# Altium PCB PCB_proj_module_1_1.PcbDoc (part 8 of 9)
Units mm, origin at the board's own origin, x right, y up, seen from the top; angles counter-clockwise.
Board outline 413 x 280 mm, 4 copper layers (Top Layer, Signal Layer 1, Signal Layer 2, Bottom Layer), stack 0.778 mm thick; 1054 components, 639 nets, 3181 pads, 673 vias.
Unrouted connection lines stored in the file: 570.
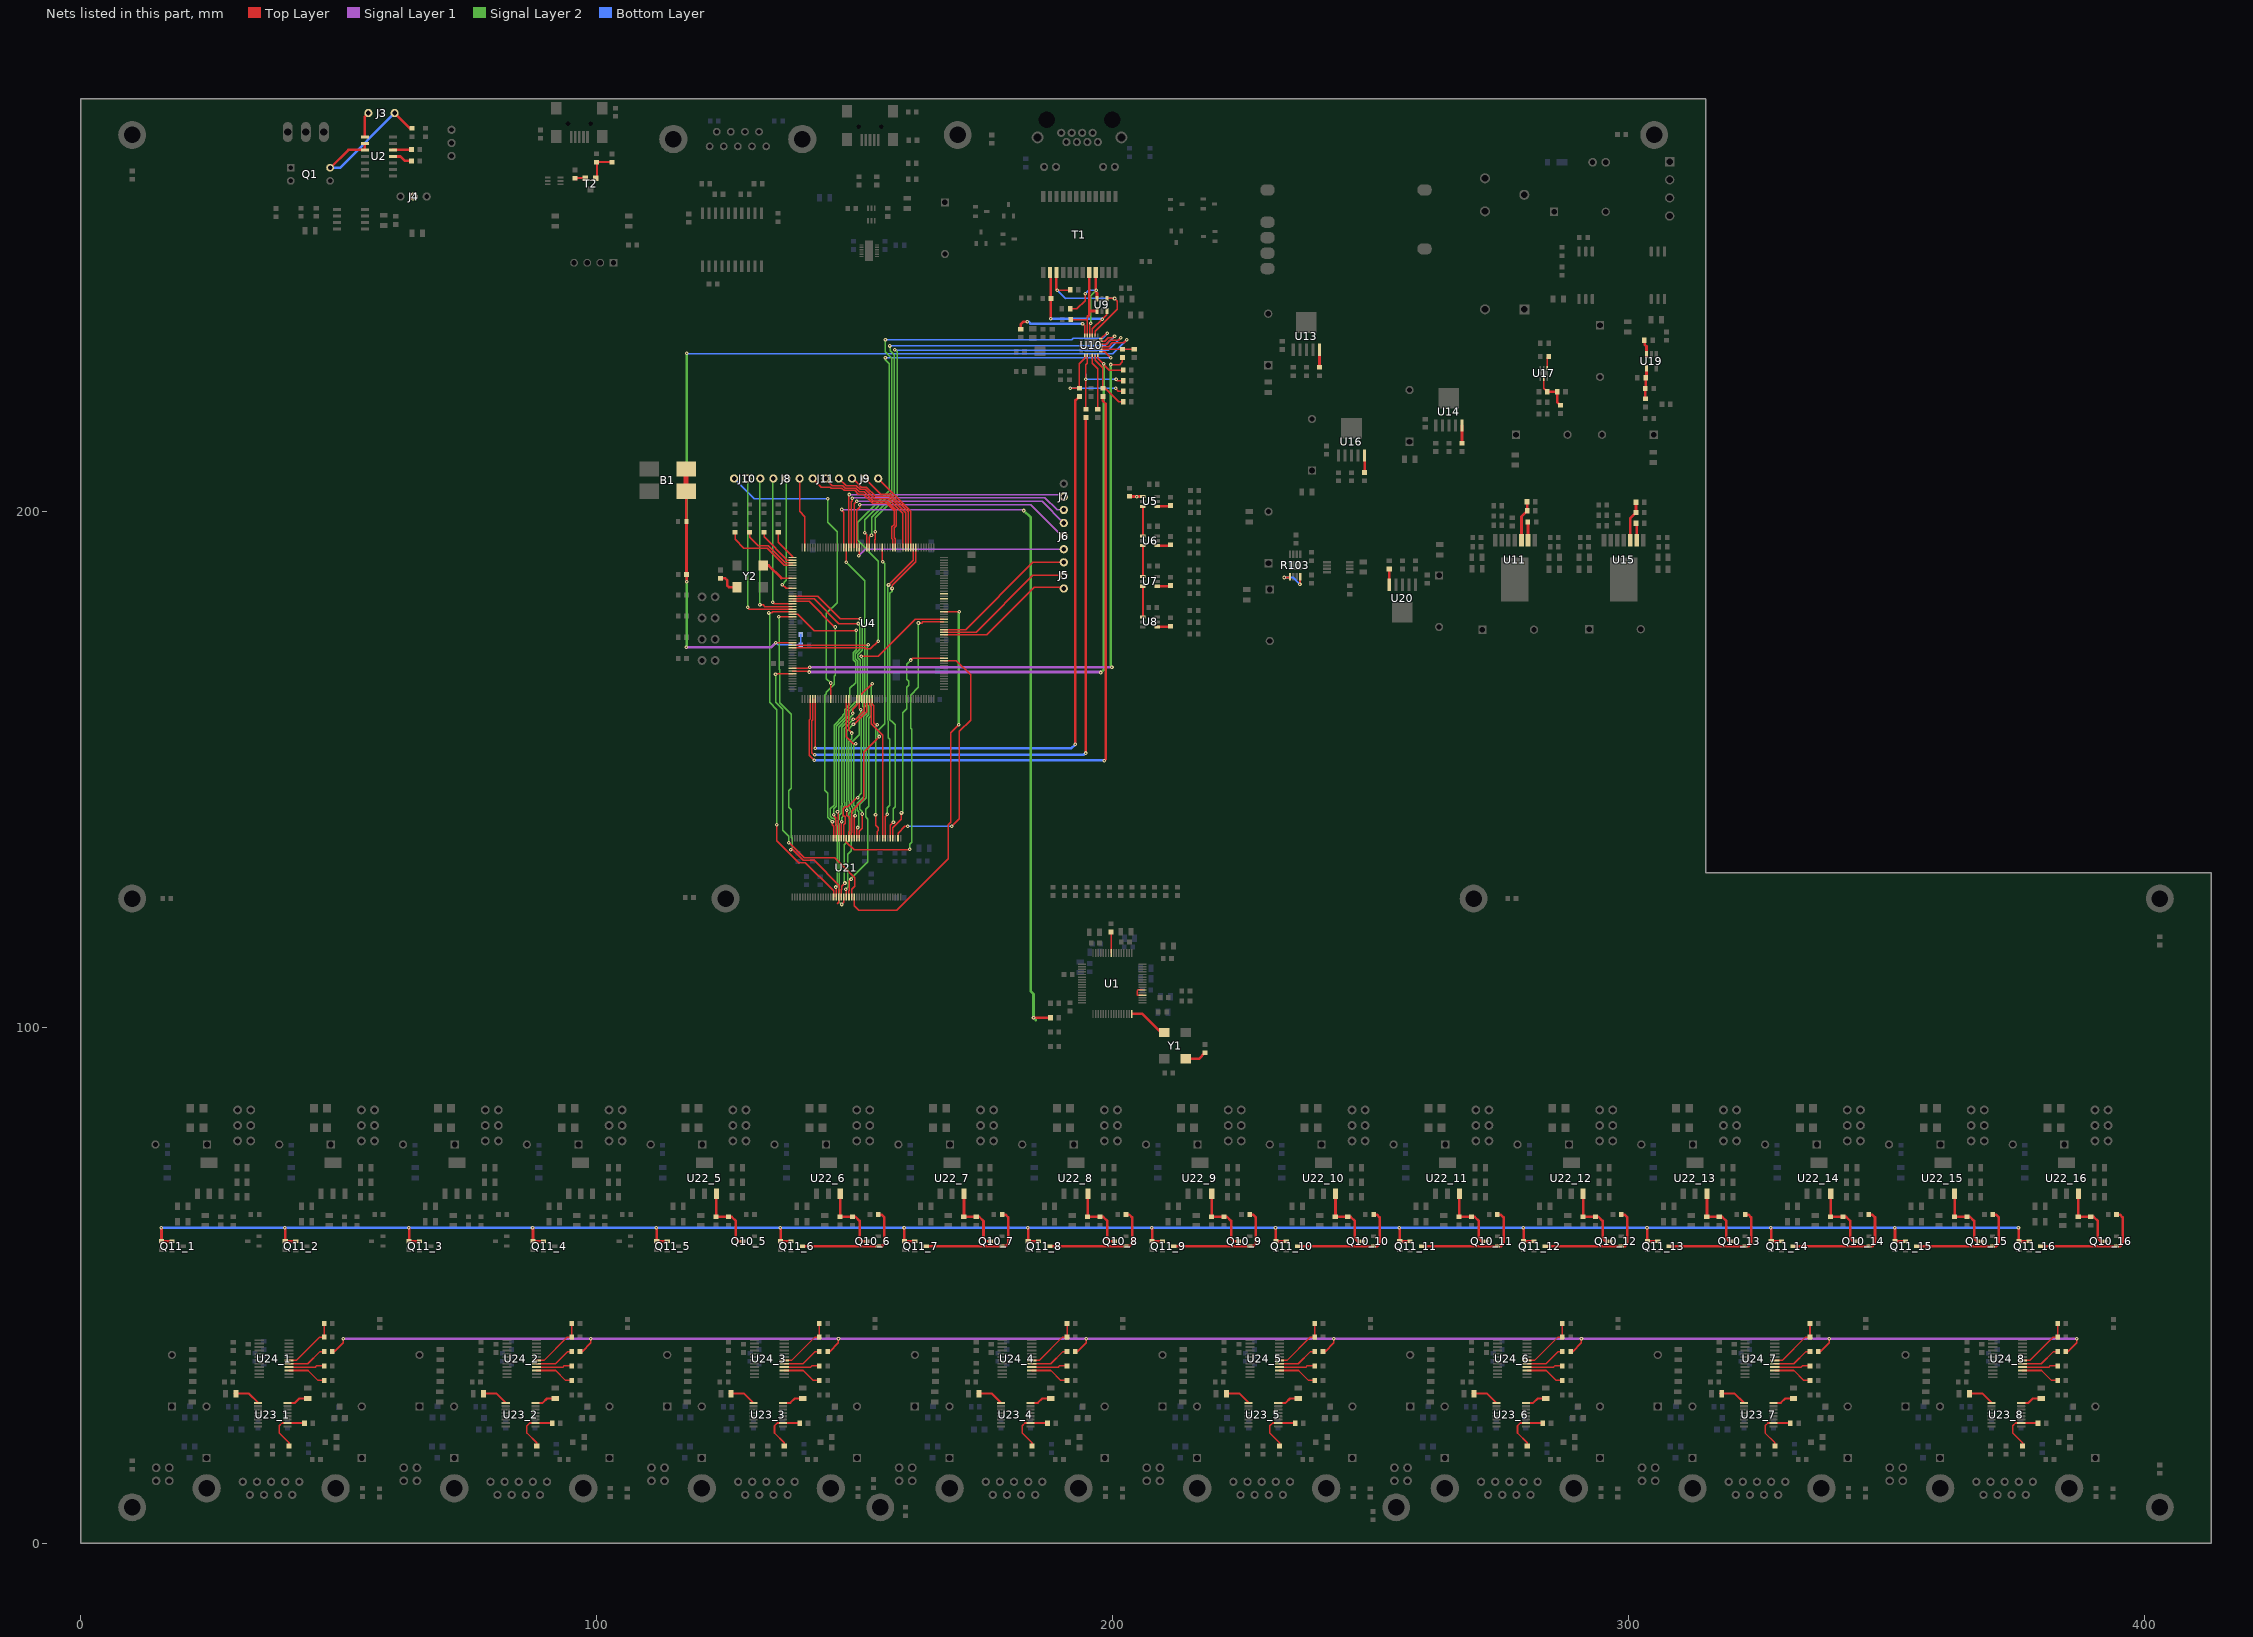
[diagram p9: the nets of this part, all layers, seen from the top]

## Via types
v1: diameter 0.7, hole 0.3, Top Layer to Bottom Layer, tented both sides, 659 vias
v2: diameter 1, hole 0.5, Top Layer to Bottom Layer, tented both sides, 12 vias
v3: diameter 0.66, hole 0.33, Top Layer to Bottom Layer, 2 vias

## Nets (pads, with @x,y where several pads share a name; then routed paths per layer and width w, separated by ;. In a path a pad name is that pad's centre, name@x,y a point inside that pad or via, vN(x,y) a via of type N, cw(c..) or ccw(c..) an arc to the next point about the centre after c; other vN are vias at no path point) (continued)
NetQ10_5_3: Q10_5.3 R113_5.1 R115_5.2 U22_5.3 | length 13.7
  Top Layer w0.5: R113_5.1@123.18,63.32 126.18,63.32 127,62.5 127,59.1 127.5,58.6 Q10_5.3@128.5,58.6 ; R113_5.1@123.23,63.37 U22_5.3@123.23,67.77
  Top Layer w0.508: R113_5.1@123.18,63.32 R113_5.1@123.23,63.37
NetQ10_6_1: Q10_6.1 Q11_6.3 R114_6.2 | length 22.7
  Top Layer w0.5: Q11_6.3@139.894,57.635 Q10_6.1@154.7,57.635 ; Q10_6.1@154.6,57.65 155.35,57.65 155.8,58.1 155.8,63.2 155.254,63.746 R114_6.2@154.614,63.746
NetQ10_6_3: Q10_6.3 R113_6.1 R115_6.2 U22_6.3 | length 13.7
  Top Layer w0.5: R113_6.1@147.18,63.32 150.18,63.32 151,62.5 151,59.1 151.5,58.6 Q10_6.3@152.5,58.6 ; R113_6.1@147.23,63.37 U22_6.3@147.23,67.77
  Top Layer w0.508: R113_6.1@147.18,63.32 R113_6.1@147.23,63.37
NetQ10_7_1: Q10_7.1 Q11_7.3 R114_7.2 | length 22.7
  Top Layer w0.5: Q11_7.3@163.894,57.635 Q10_7.1@178.7,57.635 ; Q10_7.1@178.6,57.65 179.35,57.65 179.8,58.1 179.8,63.2 179.254,63.746 R114_7.2@178.614,63.746
NetQ10_7_3: Q10_7.3 R113_7.1 R115_7.2 U22_7.3 | length 13.7
  Top Layer w0.5: R113_7.1@171.18,63.32 174.18,63.32 175,62.5 175,59.1 175.5,58.6 Q10_7.3@176.5,58.6 ; R113_7.1@171.23,63.37 U22_7.3@171.23,67.77
  Top Layer w0.508: R113_7.1@171.18,63.32 R113_7.1@171.23,63.37
NetQ10_8_1: Q10_8.1 Q11_8.3 R114_8.2 | length 22.7
  Top Layer w0.5: Q11_8.3@187.894,57.635 Q10_8.1@202.7,57.635 ; Q10_8.1@202.6,57.65 203.35,57.65 203.8,58.1 203.8,63.2 203.254,63.746 R114_8.2@202.614,63.746
NetQ10_8_3: Q10_8.3 R113_8.1 R115_8.2 U22_8.3 | length 13.7
  Top Layer w0.5: R113_8.1@195.18,63.32 198.18,63.32 199,62.5 199,59.1 199.5,58.6 Q10_8.3@200.5,58.6 ; R113_8.1@195.23,63.37 U22_8.3@195.23,67.77
  Top Layer w0.508: R113_8.1@195.18,63.32 R113_8.1@195.23,63.37
NetQ10_9_1: Q10_9.1 Q11_9.3 R114_9.2 | length 22.7
  Top Layer w0.5: Q11_9.3@211.894,57.635 Q10_9.1@226.7,57.635 ; Q10_9.1@226.6,57.65 227.35,57.65 227.8,58.1 227.8,63.2 227.254,63.746 R114_9.2@226.614,63.746
NetQ10_9_3: Q10_9.3 R113_9.1 R115_9.2 U22_9.3 | length 13.7
  Top Layer w0.5: R113_9.1@219.18,63.32 222.18,63.32 223,62.5 223,59.1 223.5,58.6 Q10_9.3@224.5,58.6 ; R113_9.1@219.23,63.37 U22_9.3@219.23,67.77
  Top Layer w0.508: R113_9.1@219.18,63.32 R113_9.1@219.23,63.37
NetQ10_10_1: Q10_10.1 Q11_10.3 R114_10.2 | length 22.7
  Top Layer w0.5: Q11_10.3@235.894,57.635 Q10_10.1@250.7,57.635 ; Q10_10.1@250.6,57.65 251.35,57.65 251.8,58.1 251.8,63.2 251.254,63.746 R114_10.2@250.614,63.746
NetQ10_10_3: Q10_10.3 R113_10.1 R115_10.2 U22_10.3 | length 13.7
  Top Layer w0.5: R113_10.1@243.18,63.32 246.18,63.32 247,62.5 247,59.1 247.5,58.6 Q10_10.3@248.5,58.6 ; R113_10.1@243.23,63.37 U22_10.3@243.23,67.77
  Top Layer w0.508: R113_10.1@243.18,63.32 R113_10.1@243.23,63.37
NetQ10_11_1: Q10_11.1 Q11_11.3 R114_11.2 | length 22.7
  Top Layer w0.5: Q11_11.3@259.894,57.635 Q10_11.1@274.7,57.635 ; Q10_11.1@274.6,57.65 275.35,57.65 275.8,58.1 275.8,63.2 275.254,63.746 R114_11.2@274.614,63.746
NetQ10_11_3: Q10_11.3 R113_11.1 R115_11.2 U22_11.3 | length 13.7
  Top Layer w0.5: R113_11.1@267.18,63.32 270.18,63.32 271,62.5 271,59.1 271.5,58.6 Q10_11.3@272.5,58.6 ; R113_11.1@267.23,63.37 U22_11.3@267.23,67.77
  Top Layer w0.508: R113_11.1@267.18,63.32 R113_11.1@267.23,63.37
NetQ10_12_1: Q10_12.1 Q11_12.3 R114_12.2 | length 22.7
  Top Layer w0.5: Q11_12.3@283.894,57.635 Q10_12.1@298.7,57.635 ; Q10_12.1@298.6,57.65 299.35,57.65 299.8,58.1 299.8,63.2 299.254,63.746 R114_12.2@298.614,63.746
NetQ10_12_3: Q10_12.3 R113_12.1 R115_12.2 U22_12.3 | length 13.7
  Top Layer w0.5: R113_12.1@291.18,63.32 294.18,63.32 295,62.5 295,59.1 295.5,58.6 Q10_12.3@296.5,58.6 ; R113_12.1@291.23,63.37 U22_12.3@291.23,67.77
  Top Layer w0.508: R113_12.1@291.18,63.32 R113_12.1@291.23,63.37
NetQ10_13_1: Q10_13.1 Q11_13.3 R114_13.2 | length 22.7
  Top Layer w0.5: Q11_13.3@307.894,57.635 Q10_13.1@322.7,57.635 ; Q10_13.1@322.6,57.65 323.35,57.65 323.8,58.1 323.8,63.2 323.254,63.746 R114_13.2@322.614,63.746
NetQ10_13_3: Q10_13.3 R113_13.1 R115_13.2 U22_13.3 | length 13.7
  Top Layer w0.5: R113_13.1@315.18,63.32 318.18,63.32 319,62.5 319,59.1 319.5,58.6 Q10_13.3@320.5,58.6 ; R113_13.1@315.23,63.37 U22_13.3@315.23,67.77
  Top Layer w0.508: R113_13.1@315.18,63.32 R113_13.1@315.23,63.37
NetQ10_14_1: Q10_14.1 Q11_14.3 R114_14.2 | length 22.7
  Top Layer w0.5: Q11_14.3@331.894,57.635 Q10_14.1@346.7,57.635 ; Q10_14.1@346.6,57.65 347.35,57.65 347.8,58.1 347.8,63.2 347.254,63.746 R114_14.2@346.614,63.746
NetQ10_14_3: Q10_14.3 R113_14.1 R115_14.2 U22_14.3 | length 13.7
  Top Layer w0.5: R113_14.1@339.18,63.32 342.18,63.32 343,62.5 343,59.1 343.5,58.6 Q10_14.3@344.5,58.6 ; R113_14.1@339.23,63.37 U22_14.3@339.23,67.77
  Top Layer w0.508: R113_14.1@339.18,63.32 R113_14.1@339.23,63.37
NetQ10_15_1: Q10_15.1 Q11_15.3 R114_15.2 | length 22.7
  Top Layer w0.5: Q11_15.3@355.894,57.635 Q10_15.1@370.7,57.635 ; Q10_15.1@370.6,57.65 371.35,57.65 371.8,58.1 371.8,63.2 371.254,63.746 R114_15.2@370.614,63.746
NetQ10_15_3: Q10_15.3 R113_15.1 R115_15.2 U22_15.3 | length 13.7
  Top Layer w0.5: R113_15.1@363.18,63.32 366.18,63.32 367,62.5 367,59.1 367.5,58.6 Q10_15.3@368.5,58.6 ; R113_15.1@363.23,63.37 U22_15.3@363.23,67.77
  Top Layer w0.508: R113_15.1@363.18,63.32 R113_15.1@363.23,63.37
NetQ10_16_1: Q10_16.1 Q11_16.3 R114_16.2 | length 22.7
  Top Layer w0.5: Q11_16.3@379.894,57.635 Q10_16.1@394.7,57.635 ; Q10_16.1@394.6,57.65 395.35,57.65 395.8,58.1 395.8,63.2 395.254,63.746 R114_16.2@394.614,63.746
NetQ10_16_3: Q10_16.3 R113_16.1 R115_16.2 U22_16.3 | length 13.7
  Top Layer w0.5: R113_16.1@387.18,63.32 390.18,63.32 391,62.5 391,59.1 391.5,58.6 Q10_16.3@392.5,58.6 ; R113_16.1@387.23,63.37 U22_16.3@387.23,67.77
  Top Layer w0.508: R113_16.1@387.18,63.32 R113_16.1@387.23,63.37
NetR7_1: R7.1 U1.57 | length 4.1
  Top Layer w0.3: U1.57@199.728,114.404 199.728,118.428 R7.1@199.8,118.5
NetR18_1: R18.1 Y1.1 | length 4.2
  Top Layer w0.508: Y1.1@214.233,93.946 216.775,93.946 R18.1@217.941,95.112
NetR27_1: R27.1 U2.11 | length 4
  Top Layer w0.5: U2.11@60.505,268.824 61.992,268.824 62.85,267.966 R27.1@64.15,267.966
NetR28_1: R28.1 U2.12 | length 3.7
  Top Layer w0.5: U2.12@60.505,270.094 63.948,270.094 R28.1@64.15,270.296
NetR31_2: R31.2 U5.4 | length 2.5
  Top Layer w0.508: U5.4@208.7,201.02 210.96,201.02 R31.2@211.11,201.17
NetR32_1: R32.1 Y2.1 | length 4.5
  Top Layer w0.5: R32.1@124.05,187.075 124.925,187.075 125.3,186.7 125.3,185.7 125.65,185.35 Y2.1@127.235,185.35
NetR34_2: R34.2 U4.1 | length 6
  Top Layer w0.254: R34.2@135.262,196 135.262,194.013 137.986,191.289 U4.1@137.986,191.106
NetR35_2: R35.2 U4.2 | length 8.3
  Top Layer w0.254: R35.2@132.468,196.05 132.468,195.107 136.969,190.606 U4.2@137.986,190.606
NetR37_2: R37.2 U4.3 | length 11.3
  Top Layer w0.254: R37.2@129.675,196.025 129.675,195.025 131.346,193.354 133.321,193.354 136.569,190.106 U4.3@137.986,190.106
NetR38_2: R38.2 U4.4 | length 14.6
  Top Layer w0.254: R38.2@126.855,195.975 126.855,194.595 128.55,192.9 133.133,192.9 136.427,189.606 U4.4@137.986,189.606
NetR39_2: R39.2 U6.4 | length 2.5
  Top Layer w0.508: U6.4@208.7,193.4 210.96,193.4 R39.2@211.11,193.55
NetR43_2: R43.2 U7.4 | length 2.5
  Top Layer w0.508: U7.4@208.7,185.526 210.96,185.526 R43.2@211.11,185.676
NetR48_2: R48.2 U8.4 | length 2.5
  Top Layer w0.508: U8.4@208.7,177.652 210.96,177.652 R48.2@211.11,177.802
NetR57_1: R57.1 R64.2 U10.8 | length 19.1
  Top Layer w0.254: R64.2@194.851,219.718 R64.2@194.851,219.842 194.849,219.844 v1(194.849,225.646) 194.849,228.478 195.119,228.748 U10.8@195.119,230.324 ; v1(200.691,225.646) 200.973,225.364 R57.1@202.057,225.364
  Bottom Layer w0.254: 194.879,226.662 194.849,226.632 v1(194.849,225.646) v1(200.691,225.646)
NetR58_1: R58.1 R65.2 U10.7 | length 19.6
  Top Layer w0.254: v1(191.8,223.9) 193.345,223.9 R65.2@193.579,224.134 ; R65.2@193.579,223.906 R65.2@193.579,224.134 ; R65.2@193.835,224.036 R65.2@193.835,224.134 ; R65.2@193.846,224.134 R65.2@193.835,224.134 ; U10.7@194.619,230.324 194.619,229.696 193.579,228.656 R65.2@193.579,224.134 ; v1(200.6,223.9) 201.168,223.332 R58.1@202.057,223.332 ; R65.2@193.579,224.134 R65.2@193.835,224.134
  Bottom Layer w0.254: v1(191.8,223.9) v1(200.6,223.9)
NetR59_1: R59.1 R67.2 U10.11 | length 12.3
  Top Layer w0.254: U10.11@196.619,230.324 196.619,229.35 198.02,227.949 198.034,227.949 198.151,227.833 R67.2@198.151,223.906 198.621,223.906 201.227,221.3 R59.1@202.057,221.3 R59.1@201.861,221.496
NetR60_1: R60.1 T1.9 U9.6 U10.22 | length 21.6
  Top Layer w0.254: R60.1@191.8,239.3 193.1,239.3 194.7,240.9 v1(194.7,242.2) ; U10.22@195.619,234.124 195.619,236.319 v1(195.8,236.5)
  Top Layer w0.508: v1@196.758,242.622 197.01,242.37 U9.6@197.01,241.273 ; v1@196.758,242.918 T1.9@196.758,246.414
  Signal Layer 2 w0.254: v1(195.8,236.5) 195.8,241.837 v1(196.881,242.918)
  Bottom Layer w0.254: v1(194.7,242.2) 195.418,242.918 v1(196.881,242.918)
NetR61_1: R61.1 T1.3 U9.4 U10.20 | length 28.6
  Top Layer w0.254: v1@189.138,243.041 v1(189.261,242.918) 189.279,242.9 R61.1@191.8,242.9 ; U10.20@196.619,234.124 196.619,234.933 200.9,239.214 200.9,240.8 v1(200.4,241.3) 198.937,241.3 U9.4@198.91,241.273
  Top Layer w0.508: v1@189.138,243.041 T1.3@189.138,246.414
  Bottom Layer w0.254: v1(189.261,242.918) 190.906,241.273 190.932,241.3 v1(200.4,241.3)
NetR62_1: R62.1 T1.8 U9.1 U10.23 | length 17.4
  Top Layer w0.254: R62.1@191.8,237.2 195.119,237.2 ; U10.23@195.119,234.124 195.119,237.2 ; 195.263,237.864 195.119,237.72 195.119,237.2
  Top Layer w0.508: 195.263,237.864 195.504,238.105 195.504,238.7 ; T1.8@195.488,246.414 195.504,246.398 195.504,238.7 ; U9.1@197.01,238.873 195.677,238.873 195.504,238.7
NetR63_1: R63.1 T1.2 U9.3 U10.21 | length 25.2
  Top Layer w0.254: U10.21@196.119,234.124 196.119,235.39 v1(198.031,237.302) 198.91,238.182 U9.3@198.91,238.873
  Top Layer w0.508: T1.2@187.868,246.414 T1.2@188.033,246.249 ; v1(188.033,237.394) 188.033,241.368 T1.2@188.033,246.249 ; T1.2@188.033,246.414 T1.2@188.033,246.249
  Bottom Layer w0.508: v1(188.033,237.394) 188.04,237.401 197.932,237.401 v1(198.031,237.302)
NetR64_1: R64.1 U4.57 | length 128.9
  Top Layer w0.254: U4.57@141.9,163.675 141.898,163.673 141.898,159.63 141.723,159.455 141.723,153.277 142.1,152.9 v1(142.3,152.9)
  Top Layer w0.5: v1(194.8,153.2) 194.851,153.251 R64.1@194.851,218.242
  Bottom Layer w0.5: v1(142.3,152.9) 194.4,152.9 v1@194.75,153.25
NetR65_1: R65.1 U4.58 | length 128
  Top Layer w0.254: v1(142.4,154.1) U4.58@142.4,163.675
  Top Layer w0.5: v1(192.8,154.9) 192.8,221.527 R65.1@193.579,222.306
  Bottom Layer w0.5: v1(142.4,154.1) 192,154.1 v1(192.8,154.9)
NetR66_2: R66.2 U10.10 | length 11.1
  Top Layer w0.254: U10.10@196.119,230.324 196.119,228.747 197.135,227.731 197.135,219.97 R66.2@196.883,219.718
NetR67_1: R67.1 U4.56 | length 139.4
  Top Layer w0.254: U4.56@141.4,163.675 141.4,159.774 141.269,159.643 141.269,152.731 v1(142.2,151.8)
  Top Layer w0.5: R67.1@198.151,222.306 198.151,221.449 198.7,220.9 198.7,152 v1(198.4,151.7)
  Bottom Layer w0.5: v1(142.2,151.8) v1@198.3,151.8
NetR68_1: R68.1 U10.24 | length 15.9
  Top Layer w0.254: v1@194.214,236.441 194.2,236.427 v1(194.2,236.425) 194.23,236.425 194.619,236.036 U10.24@194.619,234.124
  Top Layer w0.508: R68.1@182.225,235.336 182.225,236.314 182.733,236.822 v1(183.495,236.822)
  Bottom Layer w0.508: v1(183.495,236.822) 183.717,236.822 184.114,236.425 ; 184.1,236.4 v1(194.2,236.425)
NetR69_1: R69.1 U4.45 U10.12 | length 126.6
  Top Layer w0.254: U4.45@137.975,169.1 141,169.1 v1(141.2,168.9) ; U10.12@197.119,230.324 197.119,229.726 198.219,228.626 v1(198.3,228.626) ; v1@198.259,228.586 199.421,227.424 R69.1@202.057,227.424
  Signal Layer 1 w0.254: v1@197.6,168.9 v1(197.7,168.8)
  Signal Layer 1 w0.5: v1(141.2,168.9) v1@197.6,168.9
  Signal Layer 2 w0.254: v1(197.7,168.8) v1@197.8,168.8
  Signal Layer 2 w0.5: v1@197.8,168.8 198.3,169.3 v1(198.3,228.626)
  Bottom Layer w0.254: v1(198.3,228.626) v1@198.4,228.726
NetR70_2: R70.2 R71.2 U10.14 | length 6.5
  Top Layer w0.254: U10.14@197.769,231.474 201.935,231.474 R71.2@201.937,231.472 R70.2@204.223,231.472
NetR71_1: R71.1 U4.44 | length 124.1
  Top Layer w0.254: U4.44@137.975,169.6 140.9,169.6 141.1,169.8 v1(141.3,169.8) ; v1(199.7,228.5) 201.4,228.5 201.937,229.037 R71.1@201.937,229.872
  Signal Layer 1 w0.5: v1(141.3,169.8) v1(199.9,169.8)
  Signal Layer 2 w0.5: v1(199.7,228.5) 199.7,170 v1(199.9,169.8)
NetR75_1: R75.1 U11.2 | length 3.6
  Top Layer w0.508: R75.1@280.506,198.004 280.544,197.966 U11.2@280.544,194.454
NetR76_2: R76.2 R78.2 U11.3 | length 7.9
  Top Layer w0.508: U11.3@279.274,194.454 279.274,199.049 R76.2@280.375,200.15 280.375,201.875 R78.2@280.35,201.9
NetR85_2: R85.2 U13.5 | length 3.4
  Top Layer w0.508: R85.2@240.133,227.948 U13.5@240.133,231.354
NetR90_2: R90.2 U14.5 | length 3.4
  Top Layer w0.508: R90.2@267.731,213.248 267.747,213.264 U14.5@267.747,216.654
NetR93_1: R93.1 U15.2 | length 3.4
  Top Layer w0.508: R93.1@301.468,197.75 301.622,197.596 U15.2@301.622,194.454
NetR94_2: R94.2 R96.2 U15.3 | length 7.8
  Top Layer w0.508: U15.3@300.352,194.454 300.352,198.677 R94.2@301.475,199.8 R96.2@301.475,201.8
NetR98_2: R98.2 U16.5 | length 3.3
  Top Layer w0.508: R98.2@248.869,207.586 U16.5@248.869,210.85
NetR99_2: R99.2 R100.1 R102.1 U17.2 | length 7.6
  Top Layer w0.254: U17.2@283.593,225.76 283.593,223.924 R102.1@284.281,223.236
  Top Layer w0.508: R102.1@284.281,223.236 R99.2@286.199,223.236 286.199,221.252 R100.1@286.844,220.608
NetR101_2: R101.2 U17.4 | length 2.4
  Top Layer w0.254: U17.4@284.243,227.842 284.243,229.786 R101.2@284.535,230.078
NetR103_5: R103.5 R103.8 | length 6.3
  Top Layer w0.381: v1(233.275,187.219) 234.275,187.219 R103.5@234.421,187.365 ; v1(236.341,185.923) 236.371,185.953 R103.8@236.371,187.365
  Bottom Layer w0.381: v1(233.275,187.219) 235.045,187.219 v1(236.341,185.923)
NetR104_2: R104.2 U19.3 | length 2.8
  Top Layer w0.508: R104.2@303.16,233.2 303.16,232.352 303.5,232.012 U19.3@303.5,230.522
NetR105_1: R105.1 R106.1 R107.2 U19.4 | length 6.1
  Top Layer w0.5: R106.1@303.33,221.86 303.292,221.898 R105.1@303.292,223.854 303.344,223.905 R107.2@303.344,225.941 303.5,226.097 U19.4@303.5,227.822
NetR108_2: R108.2 U20.5 | length 3
  Top Layer w0.508: U20.5@253.656,185.816 R108.2@253.656,188.864
NetR109_1: R109.1 R110.2 T2.1 | length 6.6
  Top Layer w0.381: T2.1@99.849,264.624 100.05,264.825 R110.2@100.05,267.725 ; R110.2@99.849,267.71 100.05,267.911 R110.2@100.05,267.725 ; R110.2@100.025,267.725 R110.2@100.05,267.725 ; R109.1@103,267.7 102.975,267.725 R110.2@100.05,267.725
NetR111_2: R111.2 T2.2 | length 1.9
  Top Layer w0.381: R111.2@96.039,264.408 96.255,264.624 T2.2@97.817,264.624
NetR121_1_2: R121_1.2 U24_1.15 | length 7.6
  Top Layer w0.3: U24_1.15@40.37,33.525 44.075,33.525 46,31.6 R121_1.2@47.2,31.6
NetR121_2_2: R121_2.2 U24_2.15 | length 7.6
  Top Layer w0.3: U24_2.15@88.37,33.525 92.075,33.525 94,31.6 R121_2.2@95.2,31.6
NetR121_3_2: R121_3.2 U24_3.15 | length 7.6
  Top Layer w0.3: U24_3.15@136.37,33.525 140.075,33.525 142,31.6 R121_3.2@143.2,31.6
NetR121_4_2: R121_4.2 U24_4.15 | length 7.6
  Top Layer w0.3: U24_4.15@184.37,33.525 188.075,33.525 190,31.6 R121_4.2@191.2,31.6
NetR121_5_2: R121_5.2 U24_5.15 | length 7.6
  Top Layer w0.3: U24_5.15@232.37,33.525 236.075,33.525 238,31.6 R121_5.2@239.2,31.6
NetR121_6_2: R121_6.2 U24_6.15 | length 7.6
  Top Layer w0.3: U24_6.15@280.37,33.525 284.075,33.525 286,31.6 R121_6.2@287.2,31.6
NetR121_7_2: R121_7.2 U24_7.15 | length 7.6
  Top Layer w0.3: U24_7.15@328.37,33.525 332.075,33.525 334,31.6 R121_7.2@335.2,31.6
NetR121_8_2: R121_8.2 U24_8.15 | length 7.6
  Top Layer w0.3: U24_8.15@376.37,33.525 380.075,33.525 382,31.6 R121_8.2@383.2,31.6
NetR122_1_2: R122_1.2 U24_1.16 | length 6.9
  Top Layer w0.3: U24_1.16@40.37,34.175 45.475,34.175 45.7,34.4 R122_1.2@47.2,34.4
NetR122_2_2: R122_2.2 U24_2.16 | length 6.9
  Top Layer w0.3: U24_2.16@88.37,34.175 93.475,34.175 93.7,34.4 R122_2.2@95.2,34.4
NetR122_3_2: R122_3.2 U24_3.16 | length 6.9
  Top Layer w0.3: U24_3.16@136.37,34.175 141.475,34.175 141.7,34.4 R122_3.2@143.2,34.4
NetR122_4_2: R122_4.2 U24_4.16 | length 6.9
  Top Layer w0.3: U24_4.16@184.37,34.175 189.475,34.175 189.7,34.4 R122_4.2@191.2,34.4
NetR122_5_2: R122_5.2 U24_5.16 | length 6.9
  Top Layer w0.3: U24_5.16@232.37,34.175 237.475,34.175 237.7,34.4 R122_5.2@239.2,34.4
NetR122_6_2: R122_6.2 U24_6.16 | length 6.9
  Top Layer w0.3: U24_6.16@280.37,34.175 285.475,34.175 285.7,34.4 R122_6.2@287.2,34.4
NetR122_7_2: R122_7.2 U24_7.16 | length 6.9
  Top Layer w0.3: U24_7.16@328.37,34.175 333.475,34.175 333.7,34.4 R122_7.2@335.2,34.4
NetR122_8_2: R122_8.2 U24_8.16 | length 6.9
  Top Layer w0.3: U24_8.16@376.37,34.175 381.475,34.175 381.7,34.4 R122_8.2@383.2,34.4
NetR123_1_1: R123_1.1 R129_1.2 U23_1.2 | length 9.8
  Top Layer w0.3: R129_1.2@40.4,18.9 40.4,19.5 38.5,21.4 38.5,22.8 39.05,23.35 U23_1.2@40.14,23.35 43.35,23.35 R123_1.1@43.4,23.3
NetR123_2_1: R123_2.1 R129_2.2 U23_2.2 | length 9.8
  Top Layer w0.3: R129_2.2@88.4,18.9 88.4,19.5 86.5,21.4 86.5,22.8 87.05,23.35 U23_2.2@88.14,23.35 91.35,23.35 R123_2.1@91.4,23.3
NetR123_3_1: R123_3.1 R129_3.2 U23_3.2 | length 9.8
  Top Layer w0.3: R129_3.2@136.4,18.9 136.4,19.5 134.5,21.4 134.5,22.8 135.05,23.35 U23_3.2@136.14,23.35 139.35,23.35 R123_3.1@139.4,23.3
NetR123_4_1: R123_4.1 R129_4.2 U23_4.2 | length 9.8
  Top Layer w0.3: R129_4.2@184.4,18.9 184.4,19.5 182.5,21.4 182.5,22.8 183.05,23.35 U23_4.2@184.14,23.35 187.35,23.35 R123_4.1@187.4,23.3
NetR123_5_1: R123_5.1 R129_5.2 U23_5.2 | length 9.8
  Top Layer w0.3: R129_5.2@232.4,18.9 232.4,19.5 230.5,21.4 230.5,22.8 231.05,23.35 U23_5.2@232.14,23.35 235.35,23.35 R123_5.1@235.4,23.3
NetR123_6_1: R123_6.1 R129_6.2 U23_6.2 | length 9.8
  Top Layer w0.3: R129_6.2@280.4,18.9 280.4,19.5 278.5,21.4 278.5,22.8 279.05,23.35 U23_6.2@280.14,23.35 283.35,23.35 R123_6.1@283.4,23.3
NetR123_7_1: R123_7.1 R129_7.2 U23_7.2 | length 9.8
  Top Layer w0.3: R129_7.2@328.4,18.9 328.4,19.5 326.5,21.4 326.5,22.8 327.05,23.35 U23_7.2@328.14,23.35 331.35,23.35 R123_7.1@331.4,23.3
NetR123_8_1: R123_8.1 R129_8.2 U23_8.2 | length 9.8
  Top Layer w0.3: R129_8.2@376.4,18.9 376.4,19.5 374.5,21.4 374.5,22.8 375.05,23.35 U23_8.2@376.14,23.35 379.35,23.35 R123_8.1@379.4,23.3
NetR124_1_2: R124_1.2 U24_1.17 | length 8
  Top Layer w0.3: U24_1.17@40.37,34.825 44.025,34.825 46.4,37.2 R124_1.2@47.2,37.2 R124_1.2@47.4,37.2
NetR124_2_2: R124_2.2 U24_2.17 | length 8
  Top Layer w0.3: U24_2.17@88.37,34.825 92.025,34.825 94.4,37.2 R124_2.2@95.2,37.2 R124_2.2@95.4,37.2
NetR124_3_2: R124_3.2 U24_3.17 | length 8
  Top Layer w0.3: U24_3.17@136.37,34.825 140.025,34.825 142.4,37.2 R124_3.2@143.2,37.2 R124_3.2@143.4,37.2
NetR124_4_2: R124_4.2 U24_4.17 | length 8
  Top Layer w0.3: U24_4.17@184.37,34.825 188.025,34.825 190.4,37.2 R124_4.2@191.2,37.2 R124_4.2@191.4,37.2
NetR124_5_2: R124_5.2 U24_5.17 | length 8
  Top Layer w0.3: U24_5.17@232.37,34.825 236.025,34.825 238.4,37.2 R124_5.2@239.2,37.2 R124_5.2@239.4,37.2
NetR124_6_2: R124_6.2 U24_6.17 | length 8
  Top Layer w0.3: U24_6.17@280.37,34.825 284.025,34.825 286.4,37.2 R124_6.2@287.2,37.2 R124_6.2@287.4,37.2
NetR124_7_2: R124_7.2 U24_7.17 | length 8
  Top Layer w0.3: U24_7.17@328.37,34.825 332.025,34.825 334.4,37.2 R124_7.2@335.2,37.2 R124_7.2@335.4,37.2
NetR124_8_2: R124_8.2 U24_8.17 | length 8
  Top Layer w0.3: U24_8.17@376.37,34.825 380.025,34.825 382.4,37.2 R124_8.2@383.2,37.2 R124_8.2@383.4,37.2
NetR125_1_2: R125_1.2 R126_1.1 U24_1.18 | length 11.3
  Top Layer w0.3: U24_1.18@40.37,35.475 41.811,35.475 46.336,40 R125_1.2@47.2,40 R126_1.1@47.2,42.6
NetR125_2_2: R125_2.2 R126_2.1 U24_2.18 | length 11.3
  Top Layer w0.3: U24_2.18@88.37,35.475 89.811,35.475 94.336,40 R125_2.2@95.2,40 R126_2.1@95.2,42.6
NetR125_3_2: R125_3.2 R126_3.1 U24_3.18 | length 11.3
  Top Layer w0.3: U24_3.18@136.37,35.475 137.811,35.475 142.336,40 R125_3.2@143.2,40 R126_3.1@143.2,42.6
NetR125_4_2: R125_4.2 R126_4.1 U24_4.18 | length 11.3
  Top Layer w0.3: U24_4.18@184.37,35.475 185.811,35.475 190.336,40 R125_4.2@191.2,40 R126_4.1@191.2,42.6
NetR125_5_2: R125_5.2 R126_5.1 U24_5.18 | length 11.3
  Top Layer w0.3: U24_5.18@232.37,35.475 233.811,35.475 238.336,40 R125_5.2@239.2,40 R126_5.1@239.2,42.6
NetR125_6_2: R125_6.2 R126_6.1 U24_6.18 | length 11.3
  Top Layer w0.3: U24_6.18@280.37,35.475 281.811,35.475 286.336,40 R125_6.2@287.2,40 R126_6.1@287.2,42.6
NetR125_7_2: R125_7.2 R126_7.1 U24_7.18 | length 11.3
  Top Layer w0.3: U24_7.18@328.37,35.475 329.811,35.475 334.336,40 R125_7.2@335.2,40 R126_7.1@335.2,42.6
NetR125_8_2: R125_8.2 R126_8.1 U24_8.18 | length 11.3
  Top Layer w0.3: U24_8.18@376.37,35.475 377.811,35.475 382.336,40 R125_8.2@383.2,40 R126_8.1@383.2,42.6
NetR133_1_1: R133_1.1 U23_1.8 | length 4.2
  Top Layer w0.4: U23_1.8@40.14,27.25 41.55,27.25 42.4,28.1 R133_1.1@44,28.1
NetR133_2_1: R133_2.1 U23_2.8 | length 4.2
  Top Layer w0.4: U23_2.8@88.14,27.25 89.55,27.25 90.4,28.1 R133_2.1@92,28.1
NetR133_3_1: R133_3.1 U23_3.8 | length 4.2
  Top Layer w0.4: U23_3.8@136.14,27.25 137.55,27.25 138.4,28.1 R133_3.1@140,28.1
NetR133_4_1: R133_4.1 U23_4.8 | length 4.2
  Top Layer w0.4: U23_4.8@184.14,27.25 185.55,27.25 186.4,28.1 R133_4.1@188,28.1
NetR133_5_1: R133_5.1 U23_5.8 | length 4.2
  Top Layer w0.4: U23_5.8@232.14,27.25 233.55,27.25 234.4,28.1 R133_5.1@236,28.1
NetR133_6_1: R133_6.1 U23_6.8 | length 4.2
  Top Layer w0.4: U23_6.8@280.14,27.25 281.55,27.25 282.4,28.1 R133_6.1@284,28.1
NetR133_7_1: R133_7.1 U23_7.8 | length 4.2
  Top Layer w0.4: U23_7.8@328.14,27.25 329.55,27.25 330.4,28.1 R133_7.1@332,28.1
NetR133_8_1: R133_8.1 U23_8.8 | length 4.2
  Top Layer w0.4: U23_8.8@376.14,27.25 377.55,27.25 378.4,28.1 R133_8.1@380,28.1
NetR134_1_1: R134_1.1 U23_1.9 | length 5.4
  Top Layer w0.4: R134_1.1@29.8,29.1 32.55,29.1 U23_1.9@34.4,27.25
NetR134_2_1: R134_2.1 U23_2.9 | length 5.4
  Top Layer w0.4: R134_2.1@77.8,29.1 80.55,29.1 U23_2.9@82.4,27.25
NetR134_3_1: R134_3.1 U23_3.9 | length 5.4
  Top Layer w0.4: R134_3.1@125.8,29.1 128.55,29.1 U23_3.9@130.4,27.25
NetR134_4_1: R134_4.1 U23_4.9 | length 5.4
  Top Layer w0.4: R134_4.1@173.8,29.1 176.55,29.1 U23_4.9@178.4,27.25
NetR134_5_1: R134_5.1 U23_5.9 | length 5.4
  Top Layer w0.4: R134_5.1@221.8,29.1 224.55,29.1 U23_5.9@226.4,27.25
NetR134_6_1: R134_6.1 U23_6.9 | length 5.4
  Top Layer w0.4: R134_6.1@269.8,29.1 272.55,29.1 U23_6.9@274.4,27.25
NetR134_7_1: R134_7.1 U23_7.9 | length 5.4
  Top Layer w0.4: R134_7.1@317.8,29.1 320.55,29.1 U23_7.9@322.4,27.25
NetR134_8_1: R134_8.1 U23_8.9 | length 5.4
  Top Layer w0.4: R134_8.1@365.8,29.1 368.55,29.1 U23_8.9@370.4,27.25
NetU1_32: U1.32 Y1.3 | length 7.7
  Top Layer w0.5: U1.32@203.818,102.644 205.806,102.644 209.424,99.026 Y1.3@210.033,99.026
NetU1_36: U1.36 U1.38 | length 3.1
  Top Layer w0.254: U1.36@205.858,106.274 204.764,106.274 204.756,106.282 204.756,107.174 204.856,107.274 U1.38@205.858,107.274
NetU4_9: U4.9 Y2.3 | length 6.7
  Top Layer w0.254: 135.825,187.1 U4.9@137.975,187.1
  Top Layer w0.5: Y2.3@132.315,189.55 133.375,189.55 135.825,187.1
NetU4_35: U4.35 U21.17 | length 53.5
  Top Layer w0.254: U4.35@137.986,174.106 152.606,174.106 v1(152.7,174.2) ; U21.17@150.934,136.678 150.934,138.081 151.478,138.626 v1(151.478,141.383)
  Signal Layer 2 w0.254: v1(151.478,141.383) 151.478,141.807 151.021,142.264 151.021,143.321 152.263,144.563 152.263,160.104 152.81,160.652 152.81,162.282 152.49,162.602 v1@152.49,174.1
NetU4_36: U4.36 U10.13 | length 122.8
  Top Layer w0.254: U4.36@137.975,173.6 152,173.6 152.2,173.4 153.1,173.4 v1(154.6,174.9) ; U10.13@197.769,230.974 198.526,230.974 v1(199.7,229.8)
  Signal Layer 2 w0.254: v1(154.6,174.9) 154.6,190.4 150.6,194.4 150.6,197.9 156.709,204.009 156.709,228.691 156,229.4 v1(156,229.8)
  Bottom Layer w0.254: v1(156,229.8) v1(199.7,229.8)
NetU4_46: U4.46 U21.67 | length 56.8
  Top Layer w0.254: v1(134.7,168.5) 134.806,168.606 U4.46@137.986,168.606 ; v1@137.225,136.05 137.228,136.047 v1@137.228,135.893 ; v1(137.228,135.833) v1@137.228,135.893 ; U21.67@149.411,125.255 U21.67@149.434,125.278 149.456,125.3 149.456,126.825 150.05,127.419 150.05,128.994 146.18,132.864 140.257,132.864 v1@137.228,135.893
  Signal Layer 2 w0.254: v1@134.75,168.5 134.75,163.084 136.102,161.732 136.102,138.273 137.294,137.081 v1@137.294,136
NetU4_70: U4.70 U21.19 | length 28.6
  Top Layer w0.254: U4.70@148.411,163.681 148.411,156.339 149.75,155 v1(150.275,155) ; U21.19@149.934,136.678 149.934,137.655 149.976,137.698 149.976,140.906 v1(150.103,141.033)
  Signal Layer 2 w0.254: v1(150.103,141.033) 150.113,141.043 150.113,142.895 149.903,143.105 149.903,144.289 149.823,144.37 149.823,154.767 150.056,155 v1(150.275,155)
NetU4_135: U4.135 U21.68 | length 76.1
  Top Layer w0.254: U21.68@149.934,125.278 149.934,123.616 150.777,122.773 158.173,122.773 168.148,132.748 168.148,139.28 168.625,139.757 168.625,157.125 v1(170.2,158.7) ; U4.135@167.336,180.606 v1(170.294,180.606)
  Signal Layer 2 w0.5: v1(170.2,158.7) 170.2,180.5 170.3,180.6 v1(170.294,180.606)
NetU4_140: U4.140
NetU4_142: U4.142
NetU4_177: U4.177 U21.20 | length 59.5
  Top Layer w0.254: U21.20@149.434,136.678 149.413,136.699 149.413,137.777 149.513,137.877 149.513,140.616 149.426,140.703 149.426,141.932 151.8,144.305 151.8,153.4 v1(154.8,156.4) ; U4.177@155.411,193.031 155.411,190.314 v1(155.444,190.281)
  Signal Layer 2 w0.254: v1(154.8,156.4) 154.533,156.667 154.533,157.521 155.85,158.838 155.85,189.875 v1(155.444,190.281)
NetU4_180: U4.180 U10.16 | length 89.5
  Top Layer w0.254: U4.180@153.9,193.025 153.9,194.5 154,194.6 v1(154,196.1) ; U10.16@197.769,232.474 198.774,232.474 199.5,233.2 201.1,233.2 v1(201.6,233.7)
  Signal Layer 2 w0.254: v1(154,196.1) 154,198.8 158.263,203.063 158.263,230.937 v1(157.8,231.4)
  Bottom Layer w0.254: v1(157.8,231.4) 157.9,231.3 199.2,231.3 v1(201.6,233.7)
NetU4_182: U4.182 U10.17 | length 89
  Top Layer w0.254: U4.182@152.9,193.025 152.9,195 v1(153.3,195.4) ; U10.17@197.769,232.974 198.474,232.974 199.2,233.7 200.1,233.7 v1(200.4,234)
  Signal Layer 1 w0.254: v1(153.3,195.4) v1@153.4,195.4
  Signal Layer 2 w0.254: v1(153.3,195.4) 153.3,198.9 157.7,203.3 157.7,230.4 156.9,231.2 156.9,232 v1(156.8,232.1)
  Bottom Layer w0.254: v1(156.8,232.1) 198.5,232.1 v1(200.4,234)
NetU4_183: U4.183 U10.18 | length 88.6
  Top Layer w0.254: v1(152,195.9) 152.4,195.5 U4.183@152.4,193.025 ; U10.18@197.769,233.474 198.895,234.6 v1(199,234.6)
  Signal Layer 2 w0.254: v1(152,195.9) 152,198.454 157.246,203.7 157.246,229.5 157.246,229.754 156,231 v1(156,233.3)
  Bottom Layer w0.254: v1(156,233.3) 192.1,233.3 192.382,233.582 198.082,233.582 199.1,234.6 v1(199,234.6)
NetU4_191: U4.191 U21.18 | length 59.1
  Top Layer w0.254: U4.191@148.411,193.031 148.411,190.183 v1(148.434,190.16) ; U21.18@150.434,136.678 150.434,138.539 v1(150.653,138.758)
  Signal Layer 2 w0.254: v1@148.34,190.066 v1(148.434,190.16) 152.036,186.558 152.036,174.493 152.023,174.48 152.023,173.92 152.036,173.907 152.036,162.413 152.356,162.093 152.356,160.84 151.809,160.292 151.809,144.751 150.567,143.509 150.567,142.076 150.78,141.863 150.78,138.885 v1(150.653,138.758)
NetU5_3: U5.3 U6.1 | length 5.7
  Top Layer w0.381: U6.1@205.9,195.3 U5.3@205.9,201.02
NetU6_3: U6.3 U7.1 | length 6
  Top Layer w0.381: U7.1@205.9,187.426 U6.3@205.9,193.4
NetU7_3: U7.3 U8.1 | length 6
  Top Layer w0.381: U8.1@205.9,179.552 U7.3@205.9,185.526
NRST: B1.3 B1.4 C35.2 C36.2 D10.2 R29.1 R30.1 U4.34 U5.1 U10.15 | length 201.4
  Top Layer w0.254: v1(134.756,174.606) U4.34@137.986,174.606 ; U10.15@197.769,231.974 199.274,231.974 200,232.7 202.2,232.7 v1(202.8,233.3)
  Top Layer w0.508: B1.3@117.375,203.95 117.425,203.9 D10.2@117.425,198.1 117.45,198.075 R29.1@117.45,187.775 117.475,187.75 v1(117.475,186.375) ; R30.1@203.62,202.958 203.658,202.92 U5.1@205.9,202.92
  Top Layer w1: B1.3@117.375,203.95 B1.4@117.375,208.25
  Signal Layer 1 w0.508: v1(117.4,173.7) 133.85,173.7 v1(134.756,174.606)
  Signal Layer 2 w0.508: v1(117.4,173.7) 117.475,173.775 v1(117.475,186.375) 117.475,230.675 v1(117.5,230.7)
  Bottom Layer w0.254: v1@117.5,230.6 200.1,230.6 v1(202.8,233.3) ; v1(134.756,174.606) 135.206,174.156 C35.2@139.61,174.156 C36.2@139.61,176.188
  Bottom Layer w0.508: v1(204.711,202.888) v1@204.761,202.938
PD2: J9.1 U4.166 | length 16
  Top Layer w0.254: J9.1@154.6,206.4 160.9,200.1 U4.166@160.9,193.025
PD3: J9.2 U4.167 | length 17.9
  Top Layer w0.254: J9.2@152.06,206.4 155.06,203.4 156.958,203.4 160.4,199.958 U4.167@160.4,193.025
PD4: J9.3 U4.168 | length 19.9
  Top Layer w0.254: J9.3@149.52,206.4 150.02,205.9 150.2,205.9 151.338,204.762 152.292,204.762 154.108,202.946 156.77,202.946 159.9,199.816 U4.168@159.9,193.025
PD5: J11.1 U4.169 | length 21.9
  Top Layer w0.254: J11.1@146.98,206.4 148.38,205 150.384,205 151.076,204.308 152.104,204.308 153.92,202.492 156.582,202.492 159.4,199.674 U4.169@159.4,193.025
PD6: J11.2 U4.172 | length 23.8
  Top Layer w0.254: J11.2@144.44,206.4 144.44,206.21 145.65,205 147.738,205 148.192,204.546 150.196,204.546 150.888,203.854 151.916,203.854 153.732,202.038 156.394,202.038 158.131,200.301 158.131,197.231 157.723,196.823 157.723,194.945 157.9,194.768 U4.172@157.9,193.025
PD7: J11.3 U4.173 | length 25.7
  Top Layer w0.254: J11.3@141.9,206.4 143.6,204.7 145.308,204.7 145.462,204.546 147.55,204.546 148.004,204.092 150.008,204.092 150.7,203.4 151.728,203.4 153.544,201.584 156.206,201.584 157.677,200.113 157.677,197.419 157.269,197.011 157.269,194.757 157.4,194.626 U4.173@157.4,193.025
PI6: J8.1 U4.207 | length 13.8
  Top Layer w0.254: J8.1@139.36,206.4 139.36,200.04 140.4,199 U4.207@140.4,193.025
PI11: J8.2 U4.13 | length 23.2
  Top Layer w0.254: v1(135.975,185.85) 136.725,185.1 U4.13@137.975,185.1
  Signal Layer 2 w0.254: v1(135.975,185.85) 136.82,186.695 J8.2@136.82,206.4
PI12: J8.3 U4.19 | length 28
  Top Layer w0.254: v1(134.175,182.4) 134.475,182.1 U4.19@137.975,182.1
  Signal Layer 2 w0.254: v1(134.175,182.4) 134.175,206.295 J8.3@134.28,206.4
PI13: J10.1 U4.20 | length 30.9
  Top Layer w0.254: v1(131.675,181.925) 132.275,181.925 132.6,181.6 U4.20@137.975,181.6
  Signal Layer 2 w0.254: v1(131.675,181.925) 131.675,206.335 J10.1@131.74,206.4
PI14: J10.2 U4.21 | length 33.8
  Top Layer w0.254: v1(129.3,181.45) 129.65,181.1 U4.21@137.975,181.1
  Signal Layer 2 w0.254: J10.2@129.2,206.4 129.3,206.3 v1(129.3,181.45)
PI15: J10.3 U4.64 | length 60.5
  Top Layer w0.254: v1(145.375,166.775) 145.4,166.75 U4.64@145.4,163.675
  Signal Layer 2 w0.254: v1(144.8,202.5) 144.8,197.923 146.623,196.1 146.623,182.348 144.558,180.283 144.558,167.592 v1(145.375,166.775)
  Bottom Layer w0.254: J10.3@126.66,206.4 130.56,202.5 v1(144.8,202.5)
PK0: J5.1 U4.126 | length 27.2
  Top Layer w0.254: U4.126@167.336,176.106 175.598,176.106 184.872,185.38 190.272,185.38 J5.1@190.572,185.08
PK1: J5.2 U4.127 | length 27.8
  Top Layer w0.254: U4.127@167.336,176.606 173.558,176.606 184.572,187.62 J5.2@190.572,187.62
PK2: J5.3 U4.128 | length 28.6
  Top Layer w0.254: U4.128@167.336,177.106 171.518,177.106 184.572,190.16 J5.3@190.572,190.16
PK3: J6.1 U4.186 | length 42.1
  Top Layer w0.254: v1(150.825,191.425) 150.911,191.511 U4.186@150.911,193.031
  Signal Layer 1 w0.254: v1(150.825,191.425) 152.1,192.7 190.3,192.7 J6.1@190.6,193
PK4: J6.2 U4.187 | length 50.6
  Top Layer w0.254: U4.187@150.411,193.031 150.411,200.211 151,200.8 v1(151,201.3)
  Signal Layer 1 w0.254: v1(151,201.3) 184.2,201.3 190.26,195.24 J6.2@190.572,195.24
PK5: J6.3 U4.188 | length 51.1
  Top Layer w0.254: U4.188@149.911,193.031 149.911,201.511 v1(150.4,202)
  Signal Layer 1 w0.254: v1(150.4,202) 186.352,202 J6.3@190.572,197.78
PK6: J7.1 U4.189 | length 51.8
  Top Layer w0.254: U4.189@149.411,193.031 149.411,201.911 149.6,202.1 v1(149.6,202.6)
  Signal Layer 1 w0.254: v1(149.6,202.6) 149.6,202.454 149.823,202.677 186.923,202.677 189.28,200.32 J7.1@190.572,200.32
PK7: J7.2 U4.190 | length 52.2
  Top Layer w0.254: U4.190@148.9,193.025 v1@148.9,203.3
  Signal Layer 1 w0.254: v1(149,203.3) 189.7,203.3 190.1,202.9 190.44,202.9 J7.2@190.7,203.16
Rad=connect: J3.3 U2.1 | length 4.9
  Top Layer w0.5: U2.1@55.105,272.634 55.105,276.561 J3.3@55.785,277.241
Rad=open: J3.1 Q1.4 R26.1 U2.2 U2.3 | length 31.3
  Top Layer w0.5: Q1.4@48.082,266.566 48.388,266.566 51.916,270.094 U2.3@55.105,270.094 U2.2@55.105,271.364 ; J3.1@60.865,277.241 63.84,274.266 R26.1@64.25,274.266
  Bottom Layer w0.5: Q1.4@48.36,266.636 50.26,266.636 J3.1@60.865,277.241
Rad_TURN_OF_SIG: J4.2 Q11_1.1 Q11_2.1 Q11_3.1 Q11_4.1 Q11_5.1 Q11_6.1 Q11_7.1 Q11_8.1 Q11_9.1 Q11_10.1 Q11_11.1 Q11_12.1 Q11_13.1 Q11_14.1 Q11_15.1 Q11_16.1 R116_1.2 R116_2.2 R116_3.2 R116_4.2 R116_5.2 R116_6.2 R116_7.2 R116_8.2 R116_9.2 R116_10.2 R116_11.2 R116_12.2 R116_13.2 R116_14.2 R116_15.2 R116_16.2 | length 603.3
  Top Layer w0.508: v1(15.6,61.22) 15.68,61.14 R116_1.2@15.68,58.57 17.678,58.57 Q11_1.1@17.694,58.585 ; v1(39.6,61.22) 39.68,61.14 R116_2.2@39.68,58.57 41.678,58.57 Q11_2.1@41.694,58.585 ; v1(63.6,61.22) 63.68,61.14 R116_3.2@63.68,58.57 65.678,58.57 Q11_3.1@65.694,58.585 ; v1(87.6,61.22) 87.68,61.14 R116_4.2@87.68,58.57 89.678,58.57 Q11_4.1@89.694,58.585 ; v1(111.6,61.22) 111.68,61.14 R116_5.2@111.68,58.57 113.678,58.57 Q11_5.1@113.694,58.585 ; v1(135.6,61.22) 135.68,61.14 R116_6.2@135.68,58.57 137.678,58.57 Q11_6.1@137.694,58.585 ; v1(159.6,61.22) 159.68,61.14 R116_7.2@159.68,58.57 161.678,58.57 Q11_7.1@161.694,58.585 ; v1(183.6,61.22) 183.68,61.14 R116_8.2@183.68,58.57 185.678,58.57 Q11_8.1@185.694,58.585 ; v1(207.6,61.22) 207.68,61.14 R116_9.2@207.68,58.57 209.678,58.57 Q11_9.1@209.694,58.585 ; v1(231.6,61.22) 231.68,61.14 R116_10.2@231.68,58.57 233.678,58.57 Q11_10.1@233.694,58.585 ; v1(255.6,61.22) 255.68,61.14 R116_11.2@255.68,58.57 257.678,58.57 Q11_11.1@257.694,58.585 ; v1(279.6,61.22) 279.68,61.14 R116_12.2@279.68,58.57 281.678,58.57 Q11_12.1@281.694,58.585 ; v1(303.6,61.22) 303.68,61.14 R116_13.2@303.68,58.57 305.678,58.57 Q11_13.1@305.694,58.585 ; v1(327.6,61.22) 327.68,61.14 R116_14.2@327.68,58.57 329.678,58.57 Q11_14.1@329.694,58.585 ; v1(351.6,61.22) 351.68,61.14 R116_15.2@351.68,58.57 353.678,58.57 Q11_15.1@353.694,58.585 ; v1(375.6,61.22) 375.68,61.14 R116_16.2@375.68,58.57 377.678,58.57 Q11_16.1@377.694,58.585
  Bottom Layer w0.508: v1(15.6,61.22) v1(39.6,61.22) v1(63.6,61.22) ; v1(63.6,61.22) v1(87.6,61.22) ; v1(63.6,61.22) v1(87.6,61.22) ; v1(87.6,61.22) v1(111.6,61.22) ; v1(111.6,61.22) v1(135.6,61.22) ; v1(111.6,61.22) v1(135.6,61.22) ; v1(135.6,61.22) v1(159.6,61.22) ; v1(159.6,61.22) v1(183.6,61.22) ; v1(159.6,61.22) v1(183.6,61.22) ; v1(183.6,61.22) v1(207.6,61.22) ; v1(207.6,61.22) v1(231.6,61.22) ; v1(207.6,61.22) v1(231.6,61.22) ; v1(231.6,61.22) v1(255.6,61.22) ; v1(255.6,61.22) v1(279.6,61.22) ; v1(255.6,61.22) v1(279.6,61.22) ; v1(279.6,61.22) v1(303.6,61.22) ; v1(303.6,61.22) v1(327.6,61.22) ; v1(303.6,61.22) v1(327.6,61.22) ; v1(327.6,61.22) v1(351.6,61.22) ; v1(351.6,61.22) v1(375.6,61.22) v1(351.6,61.22)
SCLK: R6.2 R124_1.1 R124_2.1 R124_3.1 R124_4.1 R124_5.1 R124_6.1 R124_7.1 R124_8.1 U4.192 | length 510.8
  Top Layer w0.254: R124_1.1@48.8,37.2 49.2,37.2 50.9,38.9 v1(50.9,39.7) ; R124_2.1@96.8,37.2 97.2,37.2 98.9,38.9 v1(98.9,39.7) ; R124_3.1@144.8,37.2 145.2,37.2 146.9,38.9 v1(146.9,39.7) ; v1(147.5,200.4) 147.5,200.243 147.9,199.843 U4.192@147.9,193.025 ; R124_4.1@192.8,37.2 193.2,37.2 194.9,38.9 v1(194.9,39.7) ; R124_5.1@240.8,37.2 241.2,37.2 242.9,38.9 v1(242.9,39.7) ; R124_6.1@288.8,37.2 289.2,37.2 290.9,38.9 v1(290.9,39.7) ; R124_7.1@336.8,37.2 337.2,37.2 338.9,38.9 v1(338.9,39.7) ; R124_8.1@384.8,37.2 385.2,37.2 386.9,38.9 v1(386.9,39.7)
  Top Layer w0.5: v1(184.7,101.9) R6.2@188,101.9
  Signal Layer 1 w0.254: v1(147.5,200.4) 182.6,200.4 v1(182.8,200.2)
  Signal Layer 1 w0.5: v1(50.9,39.7) v1(98.9,39.7) v1(146.9,39.7) v1(194.9,39.7) v1(242.9,39.7) v1(290.9,39.7) v1(338.9,39.7) v1(386.9,39.7)
  Signal Layer 2 w0.5: v1(182.8,200.2) 184.178,198.822 184.178,119.578 184.178,106.991 184.7,106.469 v1(184.7,101.9) 185.15,101.45
SDRAM_A0: U4.16 U21.25 | length 60.2
  Top Layer w0.254: U4.16@137.986,183.606 142.862,183.606 147.218,179.25 v1(151.15,179.25) ; v1(146.703,141.833) 146.88,141.656 146.88,140.418 146.865,140.403 146.865,139.277 146.934,139.208 U21.25@146.934,136.678
  Signal Layer 2 w0.254: v1(146.703,141.833) 146.941,142.071 146.941,158.233 148.644,159.936 148.644,160.193 148.998,160.547 148.998,161.205 151.128,163.335 151.128,171.165 150.623,171.67 150.623,172.23 151.481,173.088 151.481,178.919 v1(151.15,179.25)
SDRAM_A1: U4.17 U21.26 | length 59.2
  Top Layer w0.254: U4.17@137.986,183.106 142.183,183.106 146.989,178.3 v1(150.725,178.3) ; v1(145.978,141.258) 145.978,141.071 146.405,140.644 146.405,139.095 146.434,139.066 U21.26@146.434,136.678
  Signal Layer 2 w0.254: v1(145.978,141.258) 145.978,142.391 146.487,142.9 146.487,158.421 148.19,160.124 148.19,160.382 148.544,160.736 148.544,161.393 150.674,163.523 150.674,170.977 150.169,171.482 150.169,172.418 151.027,173.276 151.027,177.998 v1(150.725,178.3)
SDRAM_A2: U4.18 U21.27 | length 52.9
  Top Layer w0.254: U4.18@137.986,182.606 141.207,182.606 146.213,177.6 146.238,177.625 v1(146.275,177.625) ; v1(145.728,139.883) 145.728,139.265 145.725,139.262 145.934,139.053 U21.27@145.934,136.678
  Signal Layer 2 w0.254: v1(145.728,139.883) 145.728,139.909 144.847,140.79 144.847,145.379 144.198,146.028 144.198,164.356 144.535,164.693 144.535,164.978 146.052,166.495 146.052,168.089 146.275,168.312 v1(146.275,177.625)
SDRAM_A3: U4.22 U21.60 | length 65.7
  Top Layer w0.254: v1(133.4,180.35) 133.938,180.35 134.194,180.606 U4.22@137.986,180.606 ; v1(134.95,139.3) 134.95,136.228 139.222,131.956 140.448,131.956 145.934,126.47 U21.60@145.934,125.278
  Signal Layer 2 w0.254: v1(133.4,180.35) 133.55,180.2 133.55,163 134.973,161.577 v1@134.973,139.3
SDRAM_A4: U4.23 U21.61 | length 68.7
  Top Layer w0.254: U4.23@137.986,180.106 139.044,180.106 142.227,176.923 150.298,176.923 v1(150.35,176.975) ; v1(146.4,127.225) 146.434,127.191 U21.61@146.434,125.278
  Signal Layer 2 w0.254: v1(146.4,127.225) 146.634,127.459 146.634,139.202 146.405,139.431 146.405,140.164 145.988,140.581 145.698,140.581 145.301,140.978 145.301,142.356 146.033,143.088 146.033,158.609 147.736,160.312 147.736,160.57 148.09,160.924 148.09,161.582 149.123,162.615 149.123,165.73 150.22,166.827 150.22,170.788 149.715,171.293 149.715,172.607 150.067,172.958 150.35,173.242 v1(150.35,176.975)
SDRAM_A5: U4.24 U21.62 | length 65.6
  Top Layer w0.254: v1(135.35,179.606) U4.24@137.986,179.606 ; v1(137.678,134.458) 137.775,134.555 137.775,134.7 140.065,132.41 142.172,132.41 147.077,127.505 147.077,126.945 146.934,126.802 U21.62@146.934,125.278 146.934,124.241 146.678,123.986
  Signal Layer 2 w0.254: v1(135.35,179.606) 135.433,179.523 135.433,169.417 135.55,169.3 135.55,162.926 137.748,160.728 137.748,146.422 137.219,145.893 137.219,142.731 137.748,142.202 137.748,136.877 137.905,136.72 137.905,134.615 v1@137.748,134.458
SDRAM_A6: U4.71 U21.63 | length 39.9
  Top Layer w0.254: U21.63@147.434,125.278 147.434,126.66 147.531,126.757 147.531,127.381 v1(148.15,128) ; U4.71@148.911,163.681 148.911,157.753 149.5,157.164 v1(149.5,157.075)
  Signal Layer 2 w0.254: v1(148.15,128) 148.044,128.106 148.044,135.397 148.955,136.308 148.955,140.732 148.918,140.769 148.918,141.516 149.205,141.803 149.205,142.364 148.983,142.586 148.995,142.598 148.995,143.913 148.915,143.993 148.915,155.407 149.5,155.992 v1(149.5,157.075)
SDRAM_A7: U4.74 U21.64 | length 43.2
  Top Layer w0.254: v1(147.5,123.85) 147.934,124.284 U21.64@147.934,125.278 ; v1(149.675,160.925) 149.675,161.7 150.411,162.436 U4.74@150.411,163.681
  Signal Layer 2 w0.254: v1(147.5,123.85) 147.088,124.262 147.088,139.393 146.865,139.616 146.865,140.177 147.088,140.4 147.088,141.175 147.395,141.482 147.395,142.924 147.633,143.162 147.633,143.349 147.553,143.429 147.553,158.203 149.098,159.748 149.098,160.005 149.675,160.582 v1(149.675,160.925)
SDRAM_A8: U4.75 U21.65 | length 40.3
  Top Layer w0.254: v1(148.325,126.825) 148.411,126.739 148.411,125.301 U21.65@148.434,125.278 ; U4.75@150.911,163.681 150.911,161.761 151.047,161.625 v1(151.225,161.625)
  Signal Layer 2 w0.254: v1(148.325,126.825) 148.827,127.327 148.827,128.28 148.651,128.456 148.651,133.548 149.409,134.306 149.409,140.92 149.373,140.957 149.373,141.327 ; 149.372,141.328 149.659,141.615 149.659,142.707 149.449,142.917 149.449,144.101 149.369,144.182 149.369,155.219 150.901,156.751 150.901,160.668 151.225,160.993 v1(151.225,161.625)
SDRAM_A9: U4.76 U21.66 | length 47.2
  Top Layer w0.254: U21.66@148.934,125.278 148.934,126.477 149.002,126.545 149.002,128.431 v1(149.328,128.758) ; U4.76@151.411,163.681 151.411,164.644 v1(153.427,166.66)
  Signal Layer 2 w0.254: v1(149.328,128.758) 149.275,128.811 152.611,132.147 152.611,140.389 152.177,140.823 152.177,142.324 152.717,142.864 152.717,159.916 153.264,160.463 v1@153.264,166.469
SDRAM_A10: U4.77 U21.24 | length 29.4
  Top Layer w0.254: U21.24@147.434,136.678 147.434,139.789 v1(147.542,139.897) 147.542,139.818 v1@147.621,139.739 ; v1(149.775,159.725) 150.282,159.725 151.911,161.354 U4.77@151.911,163.681
  Signal Layer 2 w0.254: v1(147.542,139.897) 147.542,140.698 147.849,141.005 147.849,142.736 148.087,142.974 148.087,143.537 148.007,143.617 148.007,157.955 149.775,159.723 v1(149.775,159.725)
SDRAM_A11: U4.78 U21.21 | length 29.1
  Top Layer w0.254: v1(148.528,142.083) 148.528,141.141 148.955,140.714 148.955,140.532 149.059,140.428 149.059,138.065 148.934,137.94 U21.21@148.934,136.678 ; v1(149.8,158.75) 150,158.75 152.418,161.168 152.418,163.674 U4.78@152.411,163.681
  Signal Layer 2 w0.254: v1(148.528,142.083) 148.528,142.773 148.541,142.786 148.541,143.725 148.461,143.805 148.461,157.411 v1(149.8,158.75)
SDRAM_B0: U4.131 U21.22 | length 63.4
  Top Layer w0.254: U21.22@148.434,136.678 148.434,135.916 149.929,134.421 160.521,134.421 v1(160.675,134.575) ; v1(162.4,178.4) 163.025,178.4 163.231,178.606 U4.131@167.336,178.606
  Signal Layer 2 w0.254: v1(160.675,134.575) 160.675,135.504 161.077,135.906 161.077,157.823 160.9,158 160.9,164.423 162.4,165.923 v1(162.4,178.4)
SDRAM_B1: U4.132 U21.23 | length 57.1
  Top Layer w0.254: U21.23@147.934,136.678 147.934,139.331 148.219,139.616 148.219,140.808 147.851,141.176 147.851,142.364 148.248,142.76 148.71,142.76 150.45,144.5 v1(150.6,144.5) ; v1(151.3,171.95) 154.65,171.95 161.806,179.106 U4.132@167.336,179.106
  Signal Layer 2 w0.254: v1(150.6,144.5) 150.6,144.65 151.355,145.405 151.355,160.48 151.902,161.028 151.902,161.905 151.582,162.225 151.582,171.493 151.125,171.95 v1(151.3,171.95)
SDRAM_D0: U4.116 U21.2 | length 49.1
  Top Layer w0.254: U21.2@158.434,136.678 158.434,137.658 159.76,138.983 v1(160.329,138.983) ; U4.116@167.325,171.1 169.758,171.1 172.5,168.358 172.5,159.6 170.305,157.405 170.305,140.48 v1(168.825,139)
  Bottom Layer w0.254: v1(160.329,138.983) 168.525,138.983 168.567,139.025 168.592,139 v1(168.825,139)
SDRAM_D1: U4.117 U21.4 | length 42.9
  Top Layer w0.254: U21.4@157.434,136.678 157.434,138.706 159.104,140.376 v1(159.104,141.583) ; v1(160.875,171.225) 161.256,171.606 U4.117@167.336,171.606
  Signal Layer 2 w0.254: v1(159.104,141.583) 159.329,141.809 159.329,160.984 160.102,161.757 160.102,165.935 160.477,166.31 160.477,167.08 160.102,167.455 160.102,170.452 v1(160.875,171.225)
SDRAM_D2: U4.164 U21.5 | length 59.9
  Top Layer w0.254: U21.5@156.934,136.678 156.934,139.164 v1(157.554,139.783) ; v1(157.277,185.1) 157.277,185.677 161.911,190.311 U4.164@161.911,193.031
  Signal Layer 2 w0.254: v1(157.277,185.1) 157.277,184.552 156.873,184.148 156.873,159.695 157.398,159.17 157.398,159.145 157.902,158.641 157.902,142.811 157.51,142.419 157.51,139.81 v1@157.483,139.783 ; v1(157.554,139.783) v1@157.483,139.783 ; v1@157.456,139.756 157.55,139.662 157.362,139.662 v1@157.456,139.756 ; v1@157.456,139.756 v1@157.483,139.783
SDRAM_D3: U4.165 U21.7 | length 59
  Top Layer w0.254: U21.7@155.934,136.678 155.934,140.864 v1(156.379,141.308) ; v1(156.6,185.775) 161.411,190.586 U4.165@161.411,193.031
  Signal Layer 2 w0.254: v1(156.379,141.308) 156.379,142.572 156.852,143.045 156.852,155.83 156.527,156.156 156.527,159.399 156.419,159.507 156.419,185.594 v1(156.6,185.775)
SDRAM_D4: U4.79 U21.8 | length 28.1
  Top Layer w0.254: U4.79@152.911,163.681 152.911,162.538 153.294,162.155 153.294,158.863 155.477,156.68 155.477,156.12 155.434,156.077 U21.8@155.434,136.678
SDRAM_D5: U4.80 U21.10 | length 28
  Top Layer w0.254: U4.80@153.4,163.675 153.4,162.691 153.75,162.341 153.75,160.307 153.748,160.305 153.748,159.095 154.143,158.7 v1(154.425,158.7) ; v1(154.079,141.208) 154.079,139.251 154.581,138.749 154.581,138.173 154.434,138.027 U21.10@154.434,136.678
  Signal Layer 2 w0.254: v1(154.079,141.208) 154.079,158.304 v1@154.45,158.675
  Bottom Layer w0.254: v1(154.425,158.7) v1@154.45,158.675